# Altium PCB SB7043.PcbDoc (part 2 of 2)
Units mm, origin at the board's own origin, x right, y up, seen from the top; angles counter-clockwise.
Board outline 70 x 43 mm, 4 copper layers (Top Layer, GND, Signal Layer 1, Bottom Layer), stack 1.534 mm thick; 111 components, 152 nets, 554 pads, 320 vias.
Unrouted connection lines stored in the file: 5.
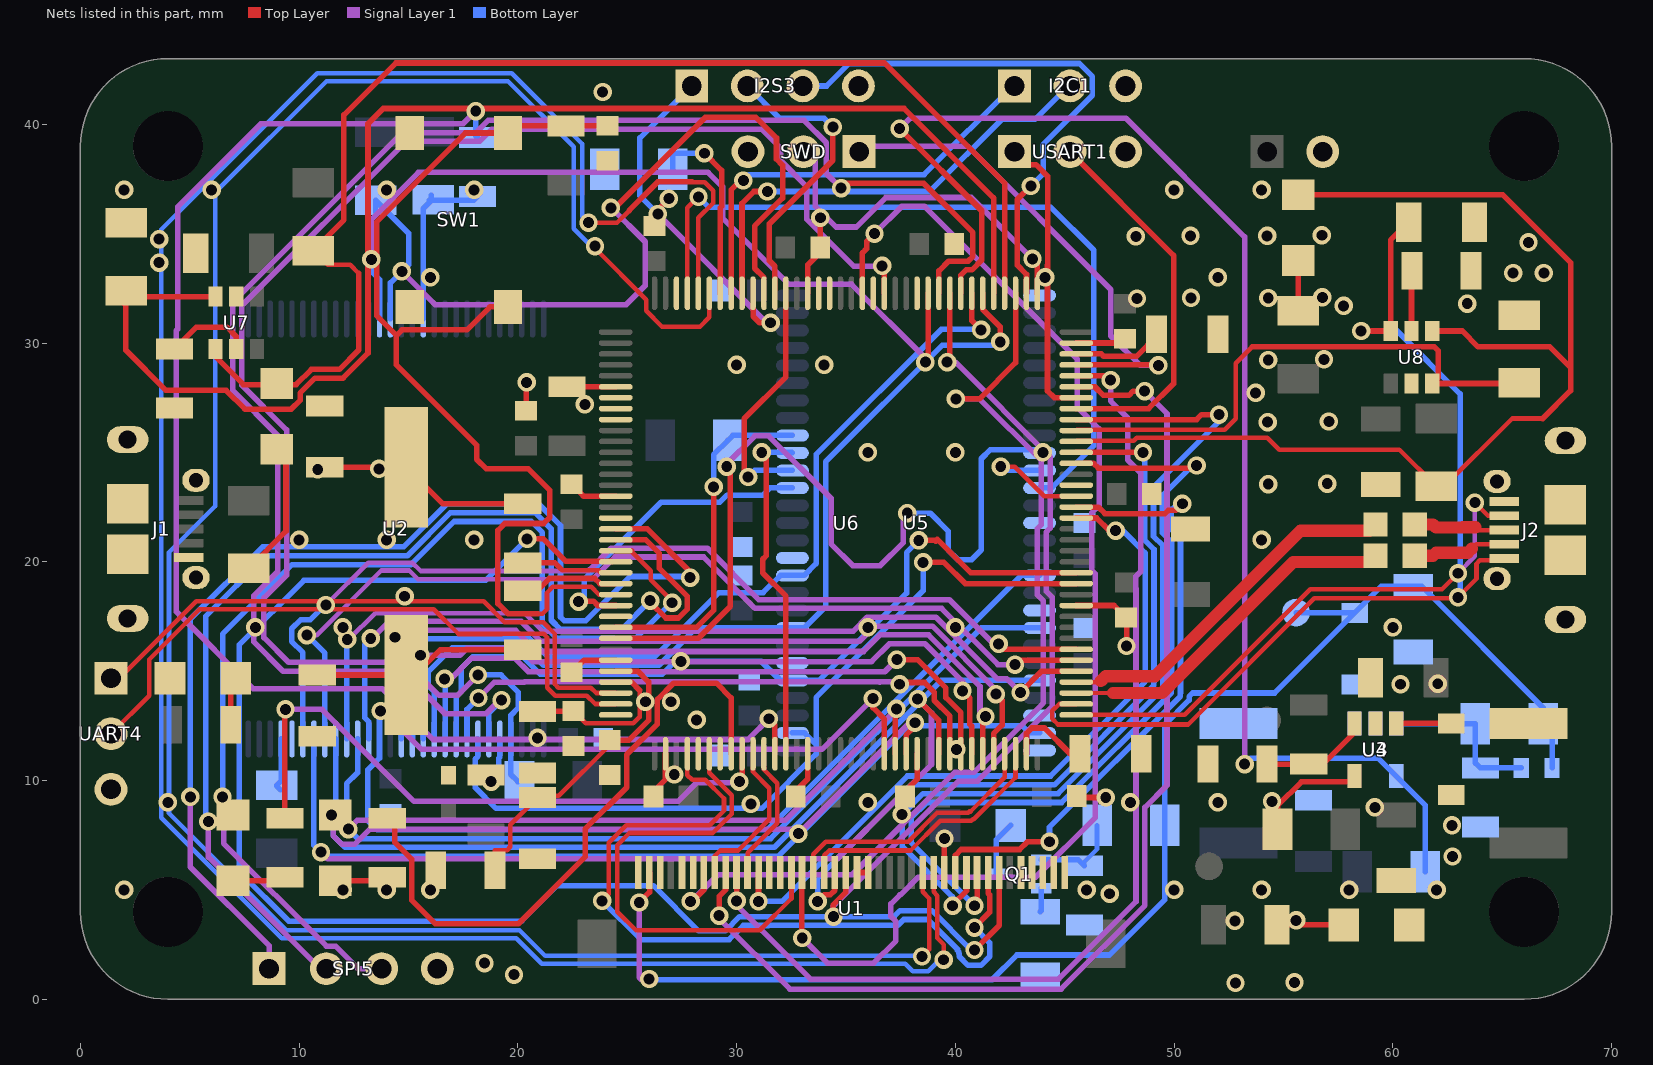
[diagram p4: the nets of this part, all layers, seen from the top]

## Via types
v1: diameter 0.84, hole 0.5, Top Layer to Signal Layer 1, 104 vias
v2: diameter 0.84, hole 0.5, Signal Layer 1 to Bottom Layer, 66 vias
v3: diameter 0.84, hole 0.5, Top Layer to Bottom Layer, 57 vias
v4: diameter 0.84, hole 0.5, Top Layer to GND, 54 vias
v5: diameter 0.84, hole 0.5, GND to Bottom Layer, 39 vias

## Nets (pads, with @x,y where several pads share a name; then routed paths per layer and width w, separated by ;. In a path a pad name is that pad's centre, name@x,y a point inside that pad or via, vN(x,y) a via of type N, cw(c..) or ccw(c..) an arc to the next point about the centre after c; other vN are vias at no path point) (continued)
B6: U1.27 U6.139 | length 103.7
  Top Layer w0.21: v3(23.525,34.425) 23.525,34.325 25.87,31.98 25.87,31.468 26.588,30.75 28.325,30.75 28.75,31.175 U6.139@28.75,32.275 ; v3(38.475,1.957) 38.482,1.957 38.802,2.277 38.802,4.607 38.501,4.908 U1.27@38.501,5.796
  Bottom Layer w0.21: v3(23.525,34.425) 23.348,34.425 22.55,35.223 22.55,38.975 19.55,41.975 11.25,41.975 6.168,36.893 6.168,22.547 4.05,20.43 4.05,8.51 9.41,3.15 20.075,3.15 21.243,1.982 29.965,1.982 29.968,1.985 38.447,1.985 v3(38.475,1.957)
B7: U1.28 U6.140 | length 109
  Top Layer w0.21: v3(23.226,35.502) 23.927,35.502 ; 25.084,36.055 24.531,35.502 23.927,35.502 ; 27.975,37.355 28.535,37.355 28.93,36.96 28.93,36.401 28.25,35.721 U6.140@28.25,32.275 ; U1.28@39.009,5.796 39.009,4.909 39.177,4.741 39.177,2.8 39.475,2.502 39.465,2.492 v3(39.465,1.807) ; 23.927,35.502 23.923,35.498 23.927,35.502
  Top Layer w0.254: 25.084,36.055 26.4,37.371 27.96,37.371
  Bottom Layer w0.21: v3(23.226,35.502) 22.95,35.778 22.95,39.1 19.715,42.335 10.835,42.335 3.69,35.19 3.69,8.31 3.7,8.3 8.412,3.588 9.21,2.79 19.926,2.79 21.093,1.622 30.114,1.622 30.117,1.625 37.701,1.625 38.044,1.282 38.762,1.282 39.405,1.925 39.465,1.865 v3(39.465,1.807)
BACKLIGHT_SHUTDOWN: R10.1 U3.4 U6.116 | length 64.3
  Top Layer w0.254: v1(37.45,39.8) 41.204,36.046 41.204,33.791 40.757,33.344 40.494,33.344 40.25,33.1 U6.116@40.25,32.275
  Signal Layer 1 w0.254: v1(37.45,39.8) 37.925,40.275 47.8,40.275 53.225,34.85 v2(53.225,10.75)
  Bottom Layer w0.254: v2(53.225,10.75) 53.502,11.027 59.323,11.027 U3.4@60.15,10.2 61.475,8.875 R10.1@61.475,5.825
CAS#: U5.17 U6.132 | length 11.4
  Top Layer w0.254: v3(30.525,23.875) 30.35,24.05 30.35,26.55 32.25,28.45 U6.132@32.25,32.275
  Bottom Layer w0.254: v3(30.525,23.875) 30.825,24.175 U5.17@32.55,24.175
CE#: R6.1 U2.32 U6.123 | length 72.1
  Top Layer w0.254: v1@36.462,33.527 v1(36.652,33.527) 36.75,33.428 U6.123@36.75,32.275
  Signal Layer 1 w0.254: 8.393,27.061 9.429,26.025 9.429,19.379 8.393,18.343 8.393,16.532 9.525,15.4 14.891,15.4 16.397,13.894 17.244,13.894 v2(18.176,14.826) ; 8.393,27.063 7.379,28.077 7.379,31.708 14.888,39.217 18.249,39.217 18.809,39.777 31.145,39.777 32.025,38.897 32.025,38.333 33.2,37.158 33.2,35.668 35.363,33.505 36.63,33.505 v1(36.652,33.527)
  Bottom Layer w0.254: v2(18.176,14.826) 19.228,14.826 20.008,14.045 20.008,13.314 19.675,12.981 U2.32@19.675,11.9 19.675,10.275 R6.1@20,9.95
CKE: U5.37 U6.29 | length 38.6
  Top Layer w0.254: U6.29@24.475,16.5 28.246,16.5 29.707,17.961 29.707,24.193 v1(29.55,24.35)
  Signal Layer 1 w0.254: v1(29.55,24.35) 29.55,24.471 30.836,25.757 31.464,25.757 34.318,22.903 34.318,20.811 35.311,19.818 36.564,19.818 37.622,20.876 37.622,22.047 v2(37.8,22.225)
  Bottom Layer w0.254: v2(37.8,22.225) 38.85,22.225 39.67,21.405 39.67,20.537 40.113,20.094 40.741,20.094 41.184,20.537 41.184,24.709 41.6,25.125 43.7,25.125 U5.37@43.85,24.975
CLK: U5.38 U6.93 | length 5.9
  Top Layer w0.21: v3(42.075,24.35) 42.707,24.35 44.057,23 U6.93@45.525,23
  Bottom Layer w0.254: v3(42.075,24.35) 42.25,24.175 U5.38@43.85,24.175
CS#: R19.1 U5.19 U6.28 | length 15.9
  Top Layer w0.254: U6.28@24.475,17 28.175,17 28.95,17.775 v3(28.95,23.425)
  Bottom Layer w0.254: v3(28.95,23.425) 28.95,24.9 R19.1@29.6,25.55 29.825,25.775 U5.19@32.55,25.775
DE: U1.34 U6.22 | length 71.3
  Top Layer w0.254: v3(20.425,21.05) 21.164,21.05 22.193,20.021 24.279,20.021 U6.22@24.297,20.003 ; v3@41.061,2.275 40.986,2.35 40.886,2.25 v3(40.875,2.25) 42.006,3.381 U1.34@42.006,5.796
  Bottom Layer w0.254: v3(20.425,21.05) 18.525,19.15 10.214,19.15 7.273,16.209 7.273,5.827 9.525,3.575 20.165,3.575 21.788,5.197 26.192,5.197 28.261,3.128 29.49,3.128 30.141,3.779 30.71,3.779 30.711,3.778 31.289,3.778 31.29,3.779 33.412,3.779 ; 33.413,3.778 37.2,3.778 37.472,4.051 38.924,4.051 v3@40.7,2.275 ; v3@40.7,2.275 40.725,2.25 v3(40.875,2.25)
DISP: U1.31 U6.100 | length 41.8
  Top Layer w0.254: v3(39.875,4.275) 39.875,4.325 40.508,4.958 U1.31@40.508,5.796 ; U6.100@45.525,26.5 51.026,26.5 51.253,26.726 v3(52.053,26.726)
  Bottom Layer w0.254: v3(39.875,4.275) 39.875,4.675 37.575,6.975 37.575,8.45 38.525,9.4 44.075,9.4 44.693,9.4 49.471,14.178 49.471,14.342 49.483,14.354 49.483,20.735 49.057,21.161 49.057,23.416 52.053,26.412 v3(52.053,26.726)
DQ0: U2.35 U5.2 U6.85 | length 38.8
  Top Layer w0.254: v3(38.525,19.975) 39.475,19.975 40.45,19 U6.85@45.525,19
  Bottom Layer w0.254: U2.35@18.175,11.9 18.175,11.106 18.052,10.983 18.052,9.673 19.002,8.723 31.154,8.723 33.637,11.206 33.637,11.64 ; U5.2@32.55,12.175 33.102,12.175 33.637,11.64 ; v3(38.525,19.975) 38.525,18.675 33.637,13.787 33.637,11.64
DQ1: U2.37 U5.5 U6.86 | length 37
  Top Layer w0.254: v3(38.327,20.976) 39.074,20.976 39.1,20.95 39.175,21.025 40.7,19.5 U6.86@45.525,19.5
  Bottom Layer w0.254: U2.37@17.175,11.9 17.175,13.829 17.419,14.073 17.419,15.139 17.93,15.65 20.232,15.65 21.015,14.867 26.61,14.867 27.193,15.45 31.127,15.45 31.925,14.652 31.925,14.575 U5.5@32.55,14.575 33.775,14.575 37.768,18.568 37.768,20.417 v3(38.327,20.976)
DQ2: U2.39 U5.8 U6.114 | length 42.7
  Top Layer w0.254: U6.114@41.25,32.275 41.25,31.539 42.052,30.737 v3(42.052,30.051)
  Bottom Layer w0.254: U2.39@16.175,11.9 16.169,11.906 16.169,14.062 15.894,14.337 15.894,14.964 17.004,16.074 20.38,16.074 21.183,15.271 26.442,15.271 27.033,15.862 27.037,15.862 28.15,16.975 U5.8@32.55,16.975 33.09,16.975 34.075,17.96 34.075,24.575 39.403,29.903 41.904,29.903 v3(42.052,30.051)
DQ3: U2.41 U5.11 U6.115 | length 42.1
  Top Layer w0.254: U6.115@40.75,32.275 40.75,31.025 v3(41.175,30.6)
  Bottom Layer w0.254: U2.41@15.175,11.9 15.196,11.921 15.196,13.723 14.794,14.125 14.794,15.954 15.317,16.478 20.547,16.478 21.35,15.675 26.275,15.675 29.188,18.588 31.215,18.588 32.002,19.375 U5.11@32.55,19.375 33.09,19.375 33.637,19.922 33.637,24.908 39.354,30.625 v3@41.175,30.625
DQ4: U2.44 U5.44 U6.58 | length 67.9
  Top Layer w0.254: v1(36.225,13.75) 36.225,13.334 36.75,12.809 U6.58@36.75,11.225
  Signal Layer 1 w0.254: v2(13.726,13.176) 13.851,13.176 15.601,11.425 33.9,11.425 v1(36.225,13.75)
  Bottom Layer w0.254: v2(13.726,13.176) 13.699,13.176 13.675,13.2 13.675,13.176 U2.44@13.675,11.9 13.675,11.022 13.139,10.486 13.139,8.169 13.56,7.748 31.384,7.748 43.011,19.375 U5.44@43.85,19.375
DQ5: U2.46 U5.47 U6.59 | length 69.6
  Top Layer w0.254: U6.59@37.25,11.225 v1@37.25,13.237
  Signal Layer 1 w0.254: v2@12.188,7.712 v2(12.25,7.775) 12.654,8.179 32.205,8.179 v1(37.302,13.276)
  Bottom Layer w0.254: U2.46@12.675,11.9 12.675,10.354 12.175,9.854 12.175,7.85 v2(12.25,7.775) 12.681,7.344 31.551,7.344 41.182,16.975 U5.47@43.85,16.975
DQ6: U2.48 U5.50 U6.60 | length 72
  Top Layer w0.254: U6.60@37.75,11.225 37.75,12.074 38.152,12.476 v1(38.152,12.641)
  Signal Layer 1 w0.254: v2(11.476,8.425) 11.568,8.518 11.568,8.425 11.568,8.079 11.553,8.064 11.553,7.486 11.961,7.078 12.539,7.078 13.236,7.775 33.045,7.775 37.91,12.641 v1(38.152,12.641)
  Bottom Layer w0.254: U2.48@11.675,11.9 11.673,10.427 11.675,10.425 11.675,8.425 11.675,8.186 11.553,8.064 11.553,7.486 12.099,6.94 31.719,6.94 39.354,14.575 U5.50@43.85,14.575
DQ7: U2.50 U5.53 U6.63 | length 77
  Top Layer w0.254: v1(38.275,13.725) 39.25,12.75 U6.63@39.25,11.225
  Signal Layer 1 w0.254: v2(11,6.725) 11.3,6.425 34.6,6.425 37.375,9.2 38.909,10.734 38.909,13.091 v1(38.275,13.725)
  Bottom Layer w0.254: U2.50@10.675,11.9 10.675,7.05 v2(11,6.725) ; v2@10.864,6.725 v2(11,6.725) ; U5.53@43.85,12.175 43.394,12.175 43.069,12.5 37.85,12.5 31.886,6.536 11.189,6.536 v2(11,6.725)
DQ8: U2.36 U6.64 | length 26.6
  Top Layer w0.254: v1(37.45,14.4) 37.532,14.482 38.589,14.482 39.032,14.039 39.032,13.669 39.75,12.951 U6.64@39.75,11.225
  Signal Layer 1 w0.254: v2(18.2,13.775) 18.923,14.498 20.3,14.498 20.309,14.507 36.539,14.507 36.544,14.502 36.549,14.507 37.343,14.507 v1(37.45,14.4)
  Bottom Layer w0.254: U2.36@17.675,11.9 17.675,13.25 v2(18.2,13.775)
DQ9: U2.38 U6.65 | length 30.4
  Top Layer w0.254: v1(37.325,15.525) 38.275,15.525 39.57,14.23 39.57,13.787 40.25,13.107 U6.65@40.25,11.225
  Signal Layer 1 w0.254: v2(16.651,14.651) 16.93,14.651 17.862,15.583 19.872,15.583 20.484,14.971 36.771,14.971 v1(37.325,15.525)
  Bottom Layer w0.254: v2(16.651,14.651) 16.675,14.627 U2.38@16.675,11.9
DQ10: U2.40 U6.66 | length 33.7
  Top Layer w0.254: v1(40.327,14.101) 40.654,13.774 40.654,12.578 40.75,12.482 U6.66@40.75,11.225
  Signal Layer 1 w0.254: v2(15.551,15.726) 17.349,15.726 17.67,16.047 20.064,16.047 20.676,15.435 36.164,15.435 36.98,16.251 38.61,16.251 40.327,14.534 v1(40.327,14.101)
  Bottom Layer w0.254: v2(15.551,15.726) 15.43,15.605 15.43,14.145 15.675,13.9 U2.40@15.675,11.9
DQ11: U2.42 U6.67 | length 36.8
  Top Layer w0.254: U6.67@41.25,11.225 41.25,12.799 v1(41.377,12.926)
  Signal Layer 1 w0.254: v2(14.376,16.551) 14.376,16.826 14.417,16.867 19.9,16.867 20.868,15.899 35.808,15.899 36.564,16.655 38.777,16.655 41.125,14.307 41.125,13.178 v1(41.377,12.926)
  Bottom Layer w0.254: v2@14.33,16.551 14.33,13.933 14.675,13.587 U2.42@14.675,11.9
DQ12: U2.45 U6.68 | length 38.8
  Top Layer w0.254: U6.68@41.75,11.225 41.75,12.15 42.134,12.534 42.134,13.669 v1(41.852,13.951)
  Signal Layer 1 w0.254: v2(13.276,16.501) 13.34,16.501 14.11,17.271 20.152,17.271 21.06,16.363 35.615,16.363 36.311,17.059 38.945,17.059 41.905,14.099 v1@42,14.099
  Bottom Layer w0.254: v2@12.994,16.494 13.013,16.475 v2@13.038,16.501 ; U2.45@13.175,11.9 13.175,12.694 12.994,12.875 12.994,16.219 v2(13.276,16.501)
DQ13: U2.47 U6.77 | length 40.8
  Top Layer w0.254: v1(42.975,14.025) 43.95,15 U6.77@45.525,15
  Signal Layer 1 w0.21: v2(12.201,16.451) 12.271,16.451 13.473,17.653 20.31,17.653 21.136,16.827 21.354,16.827
  Signal Layer 1 w0.254: 21.354,16.827 35.333,16.827 35.969,17.463 39.112,17.463 41.927,14.648 42.352,14.648 v1(42.975,14.025)
  Bottom Layer w0.254: U2.47@12.175,11.9 v2@12.175,16.451
DQ14: U2.49 U6.78 | length 44.2
  Top Layer w0.254: v1(42.725,15.3) 42.925,15.5 U6.78@45.525,15.5
  Signal Layer 1 w0.21: v2(10.355,16.649) 10.803,16.649 13.754,19.6 15.031,19.6 15.434,19.197 23.38,19.197 23.404,19.221
  Signal Layer 1 w0.254: 23.404,19.221 23.439,19.221 24.435,20.217 28.49,20.217 30.84,17.867 39.375,17.867 41.942,15.3 v1(42.725,15.3)
  Bottom Layer w0.254: v2(10.355,16.649) 10.355,16.645 11.175,15.825 U2.49@11.175,11.9
DQ15: U2.51 U6.79 | length 45
  Top Layer w0.254: v1(41.977,16.251) 41.999,16.251 v1@42.1,16.15 ; v1@41.999,16.257 42.256,16 U6.79@45.525,16
  Signal Layer 1 w0.21: v2(11.226,18.026) 13.16,19.96 15.181,19.96 15.562,19.579 23.25,19.579
  Signal Layer 1 w0.254: 23.271,19.625 24.267,20.621 28.658,20.621 31.008,18.271 39.718,18.271 41.738,16.251 v1(41.977,16.251)
  Bottom Layer w0.254: U2.51@10.175,11.9 10.175,15.843 9.658,16.36 9.658,16.938 10.066,17.346 10.5,17.346 11.18,18.026 v2(11.226,18.026)
DQM: U5.39 U6.141 | length 35.9
  Top Layer w0.21: U6.141@27.75,32.275 27.75,36.175 v3(28.255,36.68)
  Bottom Layer w0.254: v3(28.255,36.68) 28.719,36.216 44.353,36.216 46.329,34.24 46.329,25.314 44.39,23.375 U5.39@43.85,23.375
G2: U1.15 U6.42 | length 22.2
  Top Layer w0.21: U6.42@28.75,11.225 28.75,10.364 29.785,9.329 29.785,8.471 28.914,7.6 25.1,7.6 24.55,7.05 24.55,4 25.4,3.15 31.05,3.15 32.507,4.607 U1.15@32.507,5.796
G3: U1.16 U6.125 | length 58.2
  Top Layer w0.254: U1.16@32.989,5.796 32.975,5.782 32.975,4.442 32.978,4.439 32.978,2.822 v1(33,2.8) ; U6.125@35.75,32.275 35.75,34.114 35.949,34.313 35.949,34.649 v1(36.3,35)
  Signal Layer 1 w0.254: v1(33,2.8) 34.15,1.65 36.261,1.65 37.281,2.67 37.281,3.558 37.053,3.786 37.053,4.364 37.461,4.772 37.492,4.772 38.299,5.579 43.667,5.579 46.396,8.308 46.396,19.447 46.224,19.619 46.224,22.231 46.575,22.582 46.575,26.071 45.571,27.075 45.571,29.265 38.589,36.247 37.547,36.247 v1(36.3,35)
G4: U1.17 U6.69 | length 12.1
  Top Layer w0.21: U1.17@33.497,5.796 33.497,6.627 34.07,7.2 37.841,7.2 39.161,8.52 40.581,8.52 40.646,8.585 40.69,8.585 42.25,10.145 U6.69@42.25,11.225
G5: U1.18 U6.70 | length 12.1
  Top Layer w0.21: U1.18@34.005,5.796 34.005,6.576 34.23,6.8 37.95,6.8 39.31,8.16 40.73,8.16 40.795,8.225 40.839,8.225 42.75,10.136 U6.70@42.75,11.225
G6: U1.19 U6.97 | length 36
  Top Layer w0.254: v3(33.702,4.475) 33.996,4.77 34.273,4.77 34.488,4.985 U1.19@34.488,5.796 ; U6.97@45.525,25 v3@48.676,25 ; v3(48.577,25.001) v3@48.675,25.001
  Bottom Layer w0.254: v3(33.702,4.475) 33.702,5.527 37.979,9.804 44.525,9.804 49.067,14.346 49.067,14.509 49.079,14.521 49.079,20.567 48.653,20.993 48.653,24.977 48.629,25.001 v3(48.577,25.001)
G7: U1.20 U6.117 | length 37.8
  Top Layer w0.254: v1(34.427,3.775) 34.427,4.327 34.996,4.896 U1.20@34.996,5.796 ; v1(39.625,29.125) 39.75,29.25 U6.117@39.75,32.275
  Signal Layer 1 w0.254: v1(34.427,3.775) 34.427,4.262 40.136,9.972 41.018,9.972 44.426,13.38 44.426,18.381 44.15,18.657 44.15,21.35 44.334,21.534 44.334,24.791 40,29.125 v1(39.625,29.125)
GND: "5V Alt..2" C1.1 C2.1 C3.1 C4.1 C5.1 C7.1 C8.1 C9.1 C10.1 C11.1 C12.1 C13.1 C14.1 C15.1 C16.1 C17.1 C18.1 C19.1 C20.1 C21.1 C22.1 C23.1 C24.1 C25.1 C26.1 C27.1 C28.1 C29.1 C30.1 C31.1 C32.1 C33.1 C34.2 C35.2 C36.1 C37.1 C38.1 C39.1 C40.1 D2.2 I2C1.3 I2S3.4 J1.5 J1.6 J1.7 J1.8 J1.9 J1.10 J1.11 J2.5 J2.6 J2.7 J2.8 J2.9 J2.10 J2.11 LED1.1 LED2.1 LED3.1 LED7.1 R5.1 R12.1 R13.1 R14.1 R16.1 R29.1 R30.1 R35.1 R36.1 SPI5.4 SW1.2 SW1.4 SWD.3 U1.1 U1.3 U1.5 U1.6 U1.13 U1.14 U1.21 U1.22 U1.29 U1.36 U2.33 U2.52 U3.2 U4.2 U5.6 U5.12 U5.28 U5.41 U5.46 U5.52 U5.54 U6.16 U6.31 U6.38 U6.51 U6.61 U6.83 U6.94 U6.107 U6.120 U6.130 U7.2 U8.2 UART4.3 USART1.3 | length 31.5
  Top Layer w0.254: C30.1@20.375,26.9 20.375,28.175 v4(20.4,28.2) ; C20.1@22.175,15.25 22.475,14.95 23.025,15.5 U6.31@24.475,15.5 ; C20.1@22.35,14.85 C20.1@22.45,14.95 C20.1@22.45,14.838 ; C19.1@22.45,23.55 23,23 U6.16@24.475,23 ; C21.1@26.2,9.275 26.2,9.5 26.75,10.05 U6.38@26.75,11.225 ; C29.1@26.25,35.35 26.25,35.95 v4(26.9,36.6) ; C22.1@32.675,9.25 C22.1@32.7,9.275 32.7,9.525 33.25,10.075 U6.51@33.25,11.225 ; U6.130@33.25,32.275 33.25,33.575 33.8,34.125 C28.1@33.8,34.375 ; C28.1@33.825,34.4 v4(33.825,35.725) ; U1.21@35.504,5.796 U1.22@36.012,5.796 ; v4(37.552,8.45) 37.552,9.127 C23.1@37.7,9.275 37.7,9.5 38.25,10.05 U6.61@38.25,11.225 ; U1.29@39.492,5.796 39.492,7.342 v4(39.5,7.35) ; C31.1@45.35,9.275 45.4,9.225 v4(46.875,9.225) ; U6.83@45.525,18 47.25,18 C24.1@47.8,17.45 47.825,17.425 v4(47.825,16.15) ; U6.107@45.525,30 47.65,30 C26.1@47.75,30.1 ; J2.9@67.887,20.3 J2.9@67.887,20.873
  Bottom Layer w0.254: v5(18.775,9.95) 19.123,10.298 19.123,11.015 19.175,11.067 U2.33@19.175,11.9
  other v4: 2,5 46,5 50,5 54,5 58,5 62,5 62.725,6.525 32.825,7.575 62.7,7.95 30.65,8.925 4,9 36,9 48,9 52,9 20.9,11.95 28.175,12.775 27.45,15.45 8,17 12,17 36,17 40,17 60,17 10,21 14,21 18,21 54,21 36,25 40,25 44,25 53.725,27.725 30,29 34,29 57.75,31.7 63.4,31.8 16,33 52,33 65.5,33.2 66.9,33.2 3.6,33.675 66.2,34.6 3.6,34.75 2,37 6,37 14,37 18,37 50,37 54,37
  other v5: 52.804,0.746 55.502,0.773 19.825,1.125 18.475,1.65 52.779,3.584 55.577,3.611 47.05,4.825 12,5 14,5 16,5 59.175,8.775 54.475,9.05 27.15,10.275 40.05,11.425 25.825,13.6 27,13.6 60.35,14.4 62.05,14.425 14.825,18.425 54.302,23.548 57,23.575 10.852,24.223 13.65,24.25 54.277,26.385 57.075,26.412 23.062,27.198 54.302,29.223 56.85,29.25 48.3,32.038 50.773,32.065 54.302,32.06 56.775,32.087 44.102,33.002 48.25,34.875 50.748,34.902 54.252,34.898 56.75,34.925 23.875,41.475
HSYNC: U1.32 U6.96 | length 38.1
  Top Layer w0.254: v3(40.875,4.275) 40.99,4.39 U1.32@40.99,5.796 ; U6.96@45.525,24.5 46.315,24.5 46.534,24.281 50.733,24.281 50.777,24.237 50.863,24.237 v3(51.027,24.401)
  Bottom Layer w0.254: v3(40.875,4.275) 37.979,7.171 37.979,8.283 38.692,8.996 44.242,8.996 44.86,8.996 49.875,14.011 49.875,14.174 49.887,14.186 49.887,20.902 49.461,21.328 49.461,23.032 50.929,24.5 v3(51.027,24.401)
I2C1_SCL: I2C1.2 U6.136 | length 21.3
  Top Layer w0.254: U6.136@30.25,32.275 30.246,32.279 30.246,36.382 30.791,36.927 v3(31.402,36.927)
  Bottom Layer w0.254: v3(31.402,36.927) 38.823,36.927 42.121,40.225 43.64,40.225 I2C1.2@45.215,41.8
I2C1_SDA: I2C1.1 U6.137 | length 19.4
  Top Layer w0.254: U6.137@29.75,32.275 29.75,37 v3@30.089,37.339
  Bottom Layer w0.254: v3(30.309,37.43) 30.576,37.697 38.572,37.697 I2C1.1@42.675,41.8
I2S3_CK: I2S3.2 U6.133 | length 13.6
  Top Layer w0.254: U6.133@31.75,32.275 31.75,33.508 31.498,33.76 31.498,35.452 34.402,38.355 v3(34.402,39.877)
  Bottom Layer w0.254: I2S3.2@30.49,41.75 31.965,40.275 34.004,40.275 v3(34.402,39.877)
I2S3_SD: I2S3.1 U6.135 | length 16.4
  Top Layer w0.254: U6.135@30.75,32.275 30.75,31.224 31.048,30.927 v1(31.552,30.927)
  Signal Layer 1 w0.254: v2(26.4,35.9) 31.373,30.927 v1(31.552,30.927)
  Bottom Layer w0.254: v2(26.4,35.9) 25.575,36.725 25.575,39.375 I2S3.1@27.95,41.75
I2S3_WS: I2S3.3 U6.110 | length 25.4
  Top Layer w0.254: U6.110@43.25,32.275 43.25,33.153 43.236,33.153 42.828,33.561 42.828,36.553 v3(43.45,37.175)
  Bottom Layer w0.254: I2S3.3@33.03,41.75 34.118,41.75 35.145,42.777 45.665,42.777 46.267,42.175 46.267,41.325 44.009,39.067 44.009,37.734 v3(43.45,37.175)
INPUT_POWER_ENABLE: R30.2 U6.113 U7.3 | length 65.7
  Top Layer w0.254: U7.3@6.175,32.125 2.225,32.125 2.1,32 1.825,32 2.075,31.75 2.075,29.675 3.913,27.837 6.665,27.837 7.527,26.975 9.642,26.975 10.048,27.381 10.048,27.715 10.727,28.394 12.007,28.394 13.15,29.537 13.15,34.143 ; 13.149,34.144 13.149,35.056 ; 13.15,35.057 13.15,40.025 13.846,40.721 37.658,40.721 41.75,36.629 U6.113@41.75,32.275
INPUT_POWER_FAULT: LED6.1 R27.1 U6.112 U7.4 | length 59.4
  Top Layer w0.21: R27.1@10.65,34.225 11.3,33.575 12.33,33.575 12.725,33.18
  Top Layer w0.254: U7.4@6.175,29.725 6.175,29.375 7.45,28.1 9.862,28.1 10.56,28.798 11.84,28.798 12.725,29.683 12.725,33.18 ; R27.1@10.65,34.225 12.05,35.625 12.05,40.425 14.425,42.8 36.758,42.8 42.25,37.308 U6.112@42.25,32.275
LED1: R37.2 U6.44 | length 29.1
  Top Layer w0.254: R37.2@14.025,8.275 14.375,8.275 14.375,7.175 15.152,6.398 15.152,4.523 16.225,3.45 20.016,3.45 23.075,6.509 23.075,7.783 24.977,9.685 24.977,11.181 26.379,12.583 26.379,13.704 27.125,14.45 29.075,14.45 29.75,13.775 U6.44@29.75,11.225
LED2: R28.2 U6.45 | length 29.9
  Top Layer w0.254: v1(9.375,13.25) 9.375,13.5 9.35,13.525 R28.2@9.35,8.275 R28.2@9.573,8.275 ; v1(30.126,9.95) 30.25,10.074 U6.45@30.25,11.225
  Signal Layer 1 w0.254: v1(9.375,13.25) 11.054,13.25 15.254,9.05 27.325,9.05 28.172,9.897 v1@30.126,9.897
LED+: 21V_TP.1 C6.2 C18.2 D1.1 R9.2 R11.2 U1.2 | length 66.5
  Top Layer w0.254: v1(25.55,4.425) 26.025,4.9 26.025,5.775 U1.2@26.004,5.796
  Signal Layer 1 w0.254: v1(25.55,4.425) 25.55,1 25.625,0.925 v2(26,0.925)
  Bottom Layer w0.254: v2@26,0.9 41.686,0.9 42.811,2.025 47.041,2.025 49.575,4.559 R11.2@49.575,7.95 49.575,12.568 50.683,13.676 50.683,13.84 50.845,14.002 54.592,14.002 D1.1@58.25,17.66 ; 21V_TP.1@55.575,17.675 55.59,17.66 D1.1@58.25,17.66 ; C6.2@67.275,10.575 67.275,12.2 R9.2@66.875,12.6 66.875,13.325 61.325,18.875 C18.2@60.925,18.875 59.465,18.875 D1.1@58.25,17.66
NetC6_1: C6.1 R9.1 R12.2 U3.3 | length 7.6
  Bottom Layer w0.254: U3.3@60.15,12.6 R9.1@63.775,12.6 63.775,10.8 R12.2@64,10.575 C6.1@65.875,10.575
NetC16_2: C16.2 C17.2 R21.1 U6.32 | length 14.8
  Top Layer w0.21: R21.1@18.95,5.9 18.95,6.82 19.506,6.82 19.655,6.969 19.655,7.98 C17.2@20.9,9.225 20.975,9.3 21.875,9.3 24.2,11.625 C16.2@24.2,11.85
  Top Layer w0.254: R21.1@18.702,5.9 R21.1@18.95,5.9 ; C16.2@24.2,11.85 25.075,11.85 25.975,12.75 25.975,14.506 25.481,15 U6.32@24.475,15
NetC34_1: C34.1 R24.2 Y1.1 | length 10.3
  Top Layer w0.254: C34.1@10.825,14.825 Y1.1@14.9,14.825 15.3,14.825 16.45,15.975 R24.2@20.65,15.975
NetC35_1: C35.1 R25.2 Y1.2 | length 10.2
  Top Layer w0.254: C35.1@11.175,24.325 Y1.2@14.9,24.325 16.575,22.65 R25.2@20.65,22.65
NetC36_2: C36.2 U6.106 | length 4.2
  Top Layer w0.254: U6.106@45.525,29.5 46.675,29.5 46.771,29.404 48.296,29.404 49.2,30.308 C36.2@49.2,30.4
NetC37_2: C37.2 U6.71 | length 4
  Top Layer w0.254: U6.71@43.25,11.225 43.25,12.15 43.5,12.4 44.075,12.4 45.25,11.225 C37.2@45.7,11.225
NetD1_2: D1.2 L1.2 U3.1
NetD2_1: D2.1 L2.1 U4.1 | length 2
  Top Layer w0.254: U4.1@60.15,12.6 60.16,12.61 D2.1@62.175,12.61
NetLED1_2: LED1.2 R37.1 | length 2.4
  Top Layer w0.254: LED1.2@11.65,5.425 13.875,5.425 R37.1@14.025,5.575
NetLED2_2: LED2.2 R17.1 | length 3
  Top Layer w0.254: R17.1@54.7,3.4 LED2.2@57.75,3.4
NetLED3_2: LED3.2 R28.1 | length 2.4
  Top Layer w0.254: LED3.2@6.975,5.425 9.2,5.425 R28.1@9.35,5.575
NetLED4_1: LED4.1 Q1.3 | length 2.5
  Bottom Layer w0.254: Q1.3@41.875,5.725 41.875,7.3 LED4.1@42.525,7.95
NetLED5_2: LED5.2 R31.1 | length 2.3
  Top Layer w0.254: R31.1@55.675,31.475 LED5.2@55.675,33.775
NetLED6_2: LED6.2 R26.1 | length 6.3
  Top Layer w0.254: R26.1@7.7,19.7 9.4,21.4 9.4,24.675 LED6.2@8.975,25.1
NetLED7_2: LED7.2 R38.1 | length 2.2
  Top Layer w0.254: R38.1@6.875,12.55 6.875,14.45 LED7.2@7.1,14.675
NetQ1_1: Q1.1 R11.1 R13.2 | length 4.2
  Bottom Layer w0.21: R13.2@45.9,6.1 45.9,6.275 46.475,6.85 R11.1@46.475,7.95
  Bottom Layer w0.254: Q1.1@43.925,6.375 45.625,6.375 R13.2@45.9,6.1
NetQ1_2: Q1.2 R14.2 | length 1.1
  Bottom Layer w0.254: R14.2@43.875,4 43.925,4.05 Q1.2@43.925,5.075
NetR2_1: R2.1 U2.53 | length 2.5
  Bottom Layer w0.254: R2.1@9.15,9.575 8.975,9.75 R2.1@8.975,9.775 9.175,9.975 U2.53@9.175,11.9
NetR5_2: R5.2 U6.138 | length 8.9
  Top Layer w0.254: v3(28.525,38.675) 29.312,37.888 29.312,36.243 29.25,36.181 U6.138@29.25,32.275
  Bottom Layer w0.254: R5.2@27.075,37.95 27.075,38.675 v3(28.525,38.675)
NetR15_2: R15.2 R16.2 U4.3 | length 5
  Top Layer w0.254: R16.2@54.25,10.75 R15.2@56.15,10.75 56.799,10.75 58.25,12.201 U4.3@58.25,12.6
NetR18_1: R18.1 U4.4 | length 5.2
  Top Layer w0.254: R18.1@54.725,7.775 54.725,8.85 55.813,9.938 57.988,9.938 U4.4@58.25,10.2
NetR20_2: R20.2 U6.6 | length 2.2
  Top Layer w0.254: R20.2@22.25,28 U6.6@24.475,28
NetR29_2: R29.2 U7.5 | length 4
  Top Layer w0.254: R29.2@4.3,29.725 5.3,30.725 6.7,30.725 7.125,30.3 U7.5@7.125,29.725
NetR35_2: R35.2 U8.5 | length 2.8
  Top Layer w0.254: U8.5@60.85,30.55 R35.2@60.85,33.3
NOR_OE#: U2.34 U6.118 | length 76.1
  Top Layer w0.254: v1(34.777,37.077) 34.997,37.297 38.553,37.297 40.8,35.05 40.8,33.958 40.59,33.748 39.698,33.748 39.25,33.3 U6.118@39.25,32.275
  Signal Layer 1 w0.254: v2(19.251,13.676) 19.171,13.676 18.55,13.054 16.665,13.054 14.723,14.996 9.273,14.996 7.929,16.34 7.929,18.45 9.025,19.546 9.025,25.773 6.975,27.823 6.975,31.875 14.721,39.621 18.082,39.621 18.642,40.181 33.081,40.181 34.097,39.165 34.097,37.757 v1(34.777,37.077)
  Bottom Layer w0.254: U2.34@18.675,11.9 18.675,13.1 v2(19.251,13.676)
NOR_RESET#: R8.1 U2.14 U6.134 | length 40.8
  Top Layer w0.254: v1@24.339,36.089 28.567,40.317 30.883,40.317 31.822,39.378 31.822,38.403 32.099,38.126 32.099,36.624 30.825,35.35 30.825,33.419 31.25,32.994 U6.134@31.25,32.275
  Signal Layer 1 w0.254: v2(14.7,33.275) 16.221,31.754 24.954,31.754 25.822,32.622 25.822,34.628 v1@24.262,36.188
  Bottom Layer w0.254: R8.1@13.5,35.975 R8.1@13.5,36.525 15.007,35.018 15.007,33.582 v2(14.7,33.275) 14.175,32.75 U2.14@14.175,31.1
  other v1: 24.251,36.177
NOR_WE#: U2.13 U6.119 | length 38.7
  Top Layer w0.254: v1(38.625,29.125) 38.75,29.25 U6.119@38.75,32.275
  Signal Layer 1 w0.254: v2(13.3,33.825) 13.3,35.65 15.45,37.8 28.692,37.8 29.356,37.136 29.356,35.719 32.393,32.682 35.257,32.682 38.601,29.338 38.601,29.125 38.601,29.101 v1(38.625,29.125)
  Bottom Layer w0.254: v2(13.3,33.825) 13.3,33.275 13.675,32.9 U2.13@13.675,31.1
NRST: C1.2 R1.1 SW1.1 SW1.3 U6.25 | length 48.6
  Top Layer w0.21: 20.9,17.625 21.125,17.625 21.33,17.83 21.33,18.585 21.601,18.856 23.351,18.856 23.707,18.5 U6.25@24.475,18.5
  Top Layer w0.254: 13.553,34.311 13.553,34.889 ; 13.554,34.31 13.554,31.244 14.45,30.348 ; 13.554,34.89 13.554,35.55 17.604,39.6 SW1.1@19.55,39.6 19.875,39.925 R1.1@22.2,39.925 C1.2@24.1,39.925 ; SW1.3@19.55,31.65 18.725,31.65 17.673,30.598 14.7,30.598 14.45,30.348 ; 20.9,17.625 19.548,17.625 19.088,18.085 19.088,21.438 19.4,21.75 21.177,21.75 21.462,22.035 21.462,23.265 20.484,24.243 18.561,24.243 18.118,24.686 18.118,25.334 14.45,29.002 14.45,30.348
OSC_IN: R25.1 U6.23 | length 4.4
  Top Layer w0.21: 21.943,19.7 22.023,19.62 23.668,19.62 23.788,19.5 U6.23@24.475,19.5
  Top Layer w0.254: R25.1@20.275,19.95 21.693,19.95 21.943,19.7
OSC_OUT: R24.1 U6.24 | length 4.5
  Top Layer w0.254: R24.1@20.3,18.675 20.88,18.675 21.443,19.238 23.509,19.238 23.747,19 U6.24@24.475,19
OTG_ID: J2.4 U6.73 | length 25.3
  Top Layer w0.21: U6.73@45.525,13 50.486,13 56.231,18.745 62.245,18.745 v1(62.975,19.475) ; v1(63.75,22.7) 64.35,22.1 J2.4@65.087,22.1
  Signal Layer 1 w0.21: v1(62.975,19.475) 63.75,20.25 v1(63.75,22.7)
OTG_N: R33.1 U6.75 | length 16.3
  Top Layer w0.201: U6.75@45.525,14 46.401,14 ; 46.401,13.999 47.201,13.999
  Top Layer w0.56: 47.201,13.999 49.449,13.999 49.675,14.225 55.445,19.995 58.92,19.995 R33.1@59.2,20.275
OTG_P: R34.1 U6.76 | length 16.7
  Top Layer w0.201: U6.76@45.525,14.5 46.6,14.5 46.65,14.55
  Top Layer w0.56: 46.65,14.55 46.869,14.769 49.131,14.769 55.781,21.42 58.92,21.42 R34.1@59.2,21.7
OTG_POWER_ENABLE: R36.2 U6.99 U8.3 | length 25.3
  Top Layer w0.21: U6.99@45.525,26 45.561,26.036 52.317,26.036 52.825,26.544 52.825,29.075 53.573,29.823
  Top Layer w0.254: 53.573,29.823 61.901,29.823 62.082,29.641 62.082,28.432 U8.3@61.8,28.15 65.75,28.15 R36.2@65.775,28.175
OTG_POWER_FAULT: LED5.1 R32.1 U6.98 U8.4 | length 52
  Top Layer w0.21: U6.98@45.525,25.5 45.55,25.525 48.147,25.525 48.298,25.676 54.253,25.676 54.804,25.125 60.3,25.125 R32.1@61.975,23.45 62.35,23.45 65.45,26.55 66.85,26.55
  Top Layer w0.254: LED5.1@55.675,36.775 65.025,36.775 68.125,33.675 68.125,28.875 ; U8.4@61.8,30.55 63.175,30.55 63.9,29.825 67.175,29.825 68.125,28.875 ; 66.85,26.55 68.125,27.825 68.125,28.875
OTG_VBUS: C40.2 J2.1 U6.74 U8.6 | length 47.6
  Top Layer w0.21: U6.74@45.525,13.5 44.753,13.5 44.435,13.182 44.435,12.818 44.693,12.56 50.64,12.56 56.405,18.325 v3@62.975,18.325 ; v3(62.975,18.375) 63.822,19.222 63.822,19.908 63.979,20.065 65.003,20.065 J2.1@65.087,20.15
  Top Layer w0.254: v3(58.55,30.55) U8.6@59.9,30.55 59.9,34.7 C40.2@60.725,35.525
  Bottom Layer w0.254: v3(58.55,30.55) 60.2,30.55 63.075,27.675 63.075,18.475 v3(62.975,18.375)
OTGBIS_N: J2.2 R33.2 | length 4.3
  Top Layer w0.201: 63.606,20.596 63.81,20.8 J2.2@65.087,20.8
  Top Layer w0.56: R33.2@61,20.275 61.83,20.275 61.969,20.414 63.424,20.414 63.606,20.596
OTGBIS_P: J2.3 R34.2 | length 4.2
  Top Layer w0.201: 63.775,21.575 63.9,21.45 J2.3@65.087,21.45
  Top Layer w0.56: R34.2@61,21.7 61.83,21.7 61.968,21.562 63.175,21.562 63.188,21.575 63.775,21.575
PA0: U6.34 UART4.1 | length 28.1
  Top Layer w0.21: UART4.1@1.4,14.675 1.78,14.675 5.295,18.19 18.443,18.19 19.39,17.243 21.152,17.243 21.695,16.7 21.695,14.394 21.844,14.245 23.33,14.245 23.575,14 U6.34@24.475,14
  Top Layer w0.254: UART4.1@1.4,14.675 UART4.1@1.85,14.675
PA1: U6.35 UART4.2 | length 29.5
  Top Layer w0.21: UART4.2@1.4,12.135 3.145,13.88 3.145,15.531 5.444,17.83 16.155,17.83 17.285,16.7 19.264,16.7 19.269,16.705 21.181,16.705 21.33,16.556 21.33,15.329 21.335,15.324 21.335,14.245 21.7,13.88 23.156,13.88 23.536,13.5 U6.35@24.475,13.5
PA2: U6.36
PA4: U1.33 U6.40 | length 36.8
  Top Layer w0.21: v3(23.851,4.5) 24.15,4.799 24.15,7.159 24.951,7.96 28.765,7.96 29.425,8.62 29.425,9.18 28.575,10.03 27.97,10.03 27.75,10.25 U6.40@27.75,11.225
  Top Layer w0.254: v3(40.875,3.275) 40.875,3.289 41.572,3.986 41.572,4.769 41.5,4.841 U1.33@41.5,5.794
  Bottom Layer w0.254: v3(23.851,4.5) 25.627,2.724 29.657,2.724 30.308,3.375 30.543,3.375 30.544,3.374 31.456,3.374 31.457,3.375 33.245,3.375 ; 33.246,3.374 37.367,3.374 37.64,3.647 38.739,3.647 40.076,2.31 40.076,2.299 40.096,2.279 40.096,2.243 40.133,2.206 40.133,2.183 40.149,2.167 40.149,2.109 40.172,2.086 40.172,1.967 40.586,1.553 41.164,1.553 41.572,1.961 41.572,2.578 v3(40.875,3.275)
PA5: U6.41
PA7: U6.43
PA9: U6.101 USART1.2 | length 17.5
  Top Layer w0.254: USART1.2@45.233,38.743 49.974,34.001 49.974,28.139 48.836,27 U6.101@45.525,27
PA10: U6.102 USART1.1 | length 13.2
  Top Layer w0.254: USART1.1@42.725,38.775 43.341,38.159 43.681,38.159 44.222,37.618 44.222,33.561 44.212,33.551 44.212,27.807 44.519,27.5 U6.102@45.525,27.5
PA13: SWD.1 U6.105 | length 23.5
  Top Layer w0.254: U6.105@45.525,29 49.254,29 v1(49.277,28.976)
  Signal Layer 1 w0.254: SWD.1@35.55,38.4 SWD.1@35.975,38.825 ; SWD.1@35.55,39 40.55,39 47.103,32.447 47.103,30.331 48.457,28.976 v1(49.277,28.976)
PA14: SWD.2 U6.109 | length 16.7
  Top Layer w0.254: v1(43.525,33.85) 43.748,33.627 U6.109@43.75,32.275
  Signal Layer 1 w0.254: SWD.2@33.01,39 33.604,38.406 33.604,36.246 34.547,35.303 35.478,35.303 36.826,36.651 40.724,36.651 v1(43.525,33.85)
PB2: R22.1 U6.48 | length 66.8
  Top Layer w0.254: v1(31.475,12.825) 31.75,12.55 U6.48@31.75,11.225
  Signal Layer 1 w0.254: v2(18.075,40.6) 17.5,40.025 8.25,40.025 4.449,36.224 4.449,30.636 4.386,30.573 4.386,17.714 7.912,14.188 13.812,14.188 16.125,11.875 30.525,11.875 v1(31.475,12.825)
  Bottom Layer w0.254: v2(18.075,40.6) 18.075,39.475 R22.1@18.15,39.4
PC0: U5.16 U6.26 | length 14.3
  Top Layer w0.254: v3(22.776,18.176) 22.8,18.2 23.45,18.2 23.65,18 U6.26@24.475,18
  Bottom Layer w0.21: 23.026,19.201 23.038,19.213
  Bottom Layer w0.254: v3(22.776,18.176) 22.8,18.2 23.002,18.2 23.026,18.176 23.026,19.201 ; 23.038,19.213 26.553,22.728 29.239,22.728 29.561,23.05 31.203,23.05 31.528,23.375 U5.16@32.55,23.375
PC1: U6.27
PC13: U6.7
PC14: U6.8
PC15: U6.9
PCLK: U1.30 U6.92 | length 29
  Top Layer w0.254: U1.30@40,5.796 40,6.581 40.264,6.846 42.936,6.846 43.29,7.2 v3(44.302,7.2) ; U6.92@45.525,22.5 46.531,22.5 46.833,22.198 49.581,22.198 49.735,22.352 50.078,22.352 v3(50.377,22.651)
  Bottom Layer w0.254: v3(44.302,7.2) 44.302,7.867 50.279,13.844 50.279,14.007 50.291,14.019 50.291,21.069 49.865,21.495 49.865,22.39 49.895,22.39 50.156,22.651 v3(50.377,22.651)
PE1: U6.142
PF6: U6.18
PF7: SPI5.1 U6.19 | length 52.5
  Top Layer w0.254: U6.19@24.475,21.5 25.921,21.5 27.876,19.545 v3(27.876,19.276)
  Signal Layer 1 w0.254: v2(5.025,9.25) 5.025,6.05 8.625,2.45 SPI5.1@8.625,1.4
  Bottom Layer w0.254: v2(5.025,9.25) 5.025,17.375 8.329,20.679 14.779,20.679 16.75,22.65 20.953,22.65 21.95,21.653 21.95,17.475 22.117,17.308 23.108,17.308 25.125,19.325 ; 25.124,19.326 27.826,19.326 v3(27.876,19.276)
PF8: SPI5.2 U6.20 | length 53.6
  Top Layer w0.254: U6.20@24.475,21 25.85,21 26.453,20.397 26.453,19.71 27.748,18.415 27.748,17.837 27.34,17.429 26.763,17.429 26.05,18.141 v3(26.05,18.225)
  Signal Layer 1 w0.254: v2(5.85,8.125) 5.85,6.5 10.95,1.4 SPI5.2@11.24,1.4
  Bottom Layer w0.254: v2(5.85,8.125) 5.722,8.253 5.722,17.501 8.496,20.275 14.946,20.275 16.917,22.246 20.786,22.246 21.526,21.506 21.526,17.328 21.95,16.904 24.729,16.904 v3(26.05,18.225)
PF9: SPI5.3 U6.21 | length 51.8
  Top Layer w0.21: U6.21@24.475,20.5 25.162,20.5 26.071,19.591 26.071,19.178 27.051,18.198 v3(27.051,18.126)
  Top Layer w0.254: U6.21@24.475,20.5 U6.21@25.194,20.5
  Signal Layer 1 w0.254: v2(6.5,9.25) 6.547,9.203 6.547,7.127 11.247,2.427 11.665,2.427 12.692,1.4 SPI5.3@13.78,1.4
  Bottom Layer w0.254: v2(6.5,9.25) 6.5,16.696 9.675,19.871 15.114,19.871 17.085,21.842 20.619,21.842 21.122,21.339 21.122,17.16 21.782,16.5 25.386,16.5 27.051,18.166 v3(27.051,18.126)
PF11: U5.18 U6.49 | length 15.8
  Top Layer w0.254: v3(31.15,25) 31.35,24.8 31.35,20.27 31.195,20.115 31.195,19.487 32.25,18.432 U6.49@32.25,11.225
  Bottom Layer w0.254: v3(31.15,25) 32.525,25 U5.18@32.55,24.975
PG9: U6.124
PG13: U6.128
PG14: U6.129
R2: U1.7 U6.111 | length 44.5
  Top Layer w0.254: v3(27.9,4.475) 27.9,4.392 28.494,4.985 U1.7@28.494,5.796 ; v1(40.025,27.45) 41.1,27.45 42.75,29.1 U6.111@42.75,32.275
  Signal Layer 1 w0.254: v3(27.9,4.475) 27.925,4.475 29.143,5.693 35.286,5.693 39.969,10.376 40.851,10.376 44.022,13.547 44.022,18.214 43.746,18.49 43.746,21.518 43.93,21.702 43.93,24.623 41.103,27.45 v1(40.025,27.45)
R3: U1.8 U6.46 | length 7.3
  Top Layer w0.21: U1.8@29.002,5.796 29.002,6.55 29.252,6.8 30.075,6.8 31.5,8.225 31.5,9.655 30.75,10.405 U6.46@30.75,11.225
R4: U1.9 U6.103 | length 52.3
  Top Layer w0.254: v3(29.201,3.825) 29.201,4.701 29.51,5.01 U1.9@29.51,5.796 ; U6.103@45.525,28 46.373,28 46.77,27.603 47.928,27.603 48.125,27.8 v3(48.65,27.8)
  Signal Layer 1 w0.254: v3(29.201,3.825) 29.201,3.699 32.432,0.468 44.835,0.468 48.661,4.294 48.661,8.769 49.675,9.782 49.675,26.775 v3(48.65,27.8)
R5: U1.10 U6.104 | length 48.7
  Top Layer w0.254: U1.10@29.992,5.796 29.975,5.779 30.001,5.752 v3(30.001,4.5) ; U6.104@45.525,28.5 46.9,28.5 v3(47.1,28.3)
  Signal Layer 1 w0.254: v3@29.9,4.4 33.375,0.925 44.721,0.925 48.257,4.462 48.257,18.757 48.253,18.761 48.253,19.339 48.475,19.561 48.475,24.064 47.88,24.659 47.88,26.57 47.1,27.35 v3(47.1,28.3)
R6: U1.11 U6.47 | length 6.2
  Top Layer w0.21: U1.11@30.5,5.796 30.5,6.691 31.86,8.051 31.86,9.879 31.25,10.489 U6.47@31.25,11.225
R7: U1.12 U6.91 | length 32.6
  Top Layer w0.254: v3(31,4.475) 31,5.788 U1.12@31.008,5.796 ; U6.91@45.525,22 46.46,22 v3@47.035,21.425
  Bottom Layer w0.254: v3(31,4.475) 32.075,4.475 37.808,10.208 44.358,10.208 48.663,14.513 48.663,14.676 48.675,14.688 48.675,20.4 47.65,21.425 v3(47.325,21.425)
RY/BY#: R7.1 R22.2 U2.17 | length 8.1
  Bottom Layer w0.254: U2.17@15.675,31.1 15.675,36.15 R7.1@16.05,36.525 ; R7.1@15.95,36.525 R7.1@16.05,36.525 ; R7.1@16.05,36.75 R7.1@16.05,36.525 ; R22.2@18.15,36.7 17.975,36.525 R7.1@16.05,36.525
VDDA: C32.2 C33.2 L3.2 R21.2 R23.2 U6.33 | length 7.5
  Top Layer w0.21: C32.2@22.55,13.175 23.105,12.62 25.282,12.62 25.549,12.886 25.571,12.886 25.571,14.123
  Top Layer w0.254: C33.2@20.9,13.15 20.925,13.175 C32.2@22.55,13.175 ; U6.33@24.475,14.5 25.194,14.5 25.571,14.123
XL: U1.39
XR: U1.37
YD: U1.38
YU: U1.40
pads on no net: J1.2 J1.3 J1.4 U1.35 U1.41 U1.42 U2.16 U2.27 U2.28 U2.30 U2.55 U2.56 U5.4 U5.7 U5.10 U5.13 U5.15 U5.40 U5.42 U5.45 U5.48 U5.51

## Polygon pours and split planes (outlines as drawn)
5V on Top Layer "5V" (solid, pour order 13): 54.89,25.4 63.4,25.4 63.4,27.275 60.25,27.275 60.25,29.075 54.525,29.075 54.525,25.765
5V on Top Layer "5V" (solid, pour order 11): 2.925,13.625 5.825,13.625 5.825,10.225 2.925,10.225
VDDA on Top Layer "Top Layer-VDDA" (solid, pour order 10): 15.675,4.95 17.45,4.95 17.45,8.95 17.425,8.95 19.675,8.95 19.675,9.025 19.675,11.65 19.675,12.525 23.45,12.525 23.45,14.225 19.55,14.225 15.675,14.225 15.675,11.575
GND on Top Layer "GND-Pour" (solid, pour order 15): 4,0 cw(c4,4) 0,4 0,39 cw(c4,39) 4,43 66,43 cw(c66,39) 70,39 70,4 cw(c66,4) 66,0
GND on Bottom Layer "GND-Bottom" (solid, pour order 18): 4,0 cw(c4,4) 0,4 0,39 cw(c4,39) 4,43 66,43 cw(c66,39) 70,39 70,4 cw(c66,4) 66,0
5V on Signal Layer 1 "5V" (solid, pour order 14): 8.065,28.861 9.054,28.861 9.054,29.05 10.111,30.107 10.133,30.128 13.56,30.128 13.56,32.211 13.124,32.211 11.592,33.743 10.385,33.743 8.43,31.788 8.065,31.423
5V on Signal Layer 1 "5V" (solid, pour order 12): 0.08,10.55 1.43,10.55 5.25,10.55 5.25,13.07 3.95,13.07 3.95,36.296 3.95,37.371 6.727,40.148 8.129,41.55 51.6,41.55 51.6,40.025 51.6,37.5 54.525,34.575 54.525,9.95 53.4,8.825 50.65,8.825 50.65,6.475 53.15,3.975 62.5,3.975 62.5,35.05 54.525,43.025 54.425,42.925 3.95,42.925 0.08,39.055
5V_NOT-MONITORED on Signal Layer 1 "Top Layer-5VNM" (solid, pour order 16): 4.575,19.825 8.425,19.825 8.425,25.35 6.325,27.45 6.325,32.125 10.425,36.225 10.425,39.65 4.575,39.65
3V3 on Signal Layer 1 "3V3-Signal" (solid, pour order 17): 4,0 cw(c4,4) 0,4 0,39 cw(c4,39) 4,43 66,43 cw(c66,39) 70,39 70,4 cw(c66,4) 66,0
GND on GND (split plane): 66.249,42.483 66.497,42.456 66.742,42.412 66.984,42.35 67.22,42.272 67.45,42.176 67.673,42.065 67.888,41.937 68.092,41.795 68.287,41.639 68.469,41.469 68.639,41.287 68.795,41.092 68.937,40.888 69.065,40.673 69.176,40.45 69.272,40.22 69.35,39.984 69.412,39.742 69.456,39.497 69.483,39.249 69.491,39.016 69.49,39 69.49,4 69.491,3.984 69.483,3.751 69.456,3.503 69.412,3.258 69.35,3.016 69.272,2.78 69.176,2.55 69.065,2.327 68.937,2.112 68.795,1.908 68.639,1.713 68.469,1.531 68.287,1.361 68.092,1.205 67.888,1.063 67.673,0.935 67.45,0.824 67.22,0.728 66.984,0.65 66.742,0.588 66.497,0.544 66.249,0.517 66.016,0.509 66,0.51 4,0.51 3.984,0.509 3.751,0.517 3.503,0.544 3.258,0.588 3.016,0.65 2.78,0.728 2.55,0.824 2.327,0.935 2.112,1.063 1.908,1.205 1.713,1.361 1.531,1.531 1.361,1.713 1.205,1.908 1.063,2.112 0.935,2.327 0.824,2.55 0.728,2.78 0.65,3.016 0.588,3.258 0.544,3.503 0.517,3.751 0.509,3.984 0.51,4 0.51,39 0.509,39.016 0.517,39.249 0.544,39.497 0.588,39.742 0.65,39.984 0.728,40.22 0.824,40.45 0.935,40.673 1.063,40.888 1.205,41.092 1.361,41.287 1.531,41.469 1.713,41.639 1.908,41.795 2.112,41.937 2.327,42.065 2.55,42.176 2.78,42.272 3.016,42.35 3.258,42.412 3.503,42.456 3.751,42.483 3.984,42.491 4,42.49 66,42.49 66.016,42.491

## Other copper
Top Layer:
  region net 5V: 7.675,31.475 2.357,31.475 2.357,30.35 4.525,30.35 4.95,30.775 5.2,31.025 7.675,31.025
  region net 5V_NOT-MONITORED: 8.86,21.35 8.86,24.19 8.015,24.19 8.015,26.01 7.65,26.375 4.975,26.375 4.975,24.95 6.326,24.19 6.326,20.728 8.238,20.728
  region net 3V3: 53.425,14.9 53.425,12.125 57.05,12.125 57.05,14.9
  region net 5V: 60.685,10.96 61.31,10.96 61.3,10.95 61.3,6.45 56.6,6.45 56.55,6.5 56.55,8.925 58.85,8.925 59.375,9.6 59.375,10.95
  region net NetD2_1: 68.177,13.44 68.162,13.425 59.738,13.425 59.738,11.75 60.087,11.4 68.188,11.4
  region net 3V3: 64.21,6.235 68.19,6.235 68.2,6.245 68.2,10.05 64.2,10.05
  region net 3V3: 60.75,17.575 60.75,13.8 64.5,13.8 64.6,13.7 64.6,17.575
  region net 5V_NOT-MONITORED: 7.704,31.625 8.61,31.625 8.61,32.75 9.125,32.75 9.125,35.725 11.75,35.725 11.75,38.475 7.125,38.475 7.125,33.3 7.704,33.3 7.704,33.046
  region net 5V: 7.675,29.075 9.45,29.075 11.725,29.075 11.725,31.4 11.725,32.575 10.975,33.325 9.35,33.325 9.35,32.525 8.825,32.525 8.825,31.475 7.675,31.475
Bottom Layer:
  rectangle net 5V: 51.02,4.525 59.2,7.995
  region net NetD1_2: 50.96,11.795 58.6,11.795 58.6,13.725 59.07,13.725 59.07,14.9 56,14.9 54.825,13.725 50.96,13.725

## Silkscreen, mask and mechanical layers (free items; w line width, h text height)
Mechanical 1:
  the board outline again, w0.102
Mechanical 4:
  circle w0.102: c66,4 r1.6
  circle w0.102: c4,4 r1.6
  circle w0.102: c4,39 r1.6
  circle w0.102: c66,39 r1.6
  lines w0.102: 0,21.5 70,21.5 ; 35,0 35,43

## Dimensions
66,43 to 66,0 on Mechanical 3
0,4 to 70,4 on Mechanical 3

## Text inside footprints (layer, text, board x,y; h text height)
J1: Mechanical 3 "board edge" at 0.804,28.612 h0.2 r270
J2: Mechanical 3 "board edge" at 69.246,14.338 h0.2 r90
U1: Top Overlay "1" at 25.954,8.311 h1.97 r180